# Altium PCB Probe.PcbDoc (part 1 of 2)
Units mil, origin at the board's own origin, x right, y up, seen from the top; angles counter-clockwise.
Board outline 2755.91 x 787.4 mil, 4 copper layers (Top, Ground, Layer 1, Bottom Layer), stack 51.58 mil thick; 53 components, 31 nets, 148 pads, 198 vias.
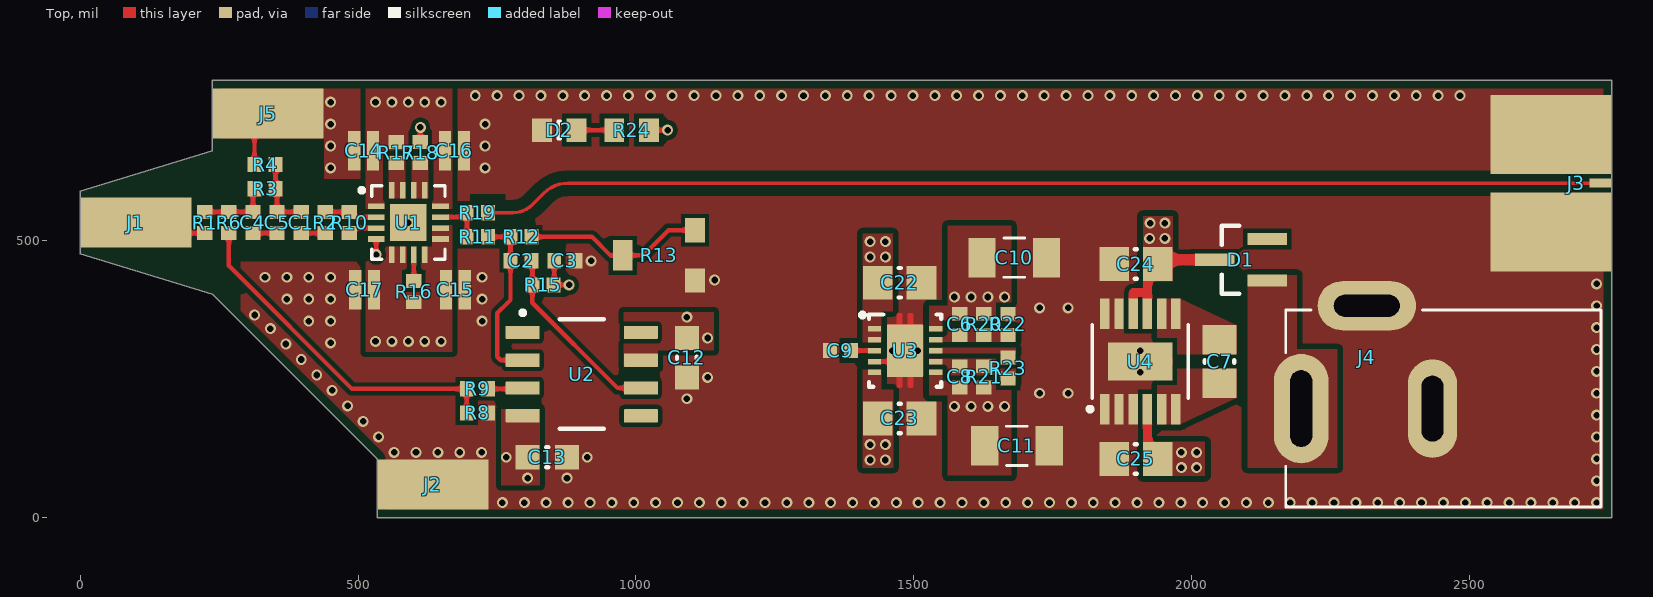
[diagram p0: Top view]
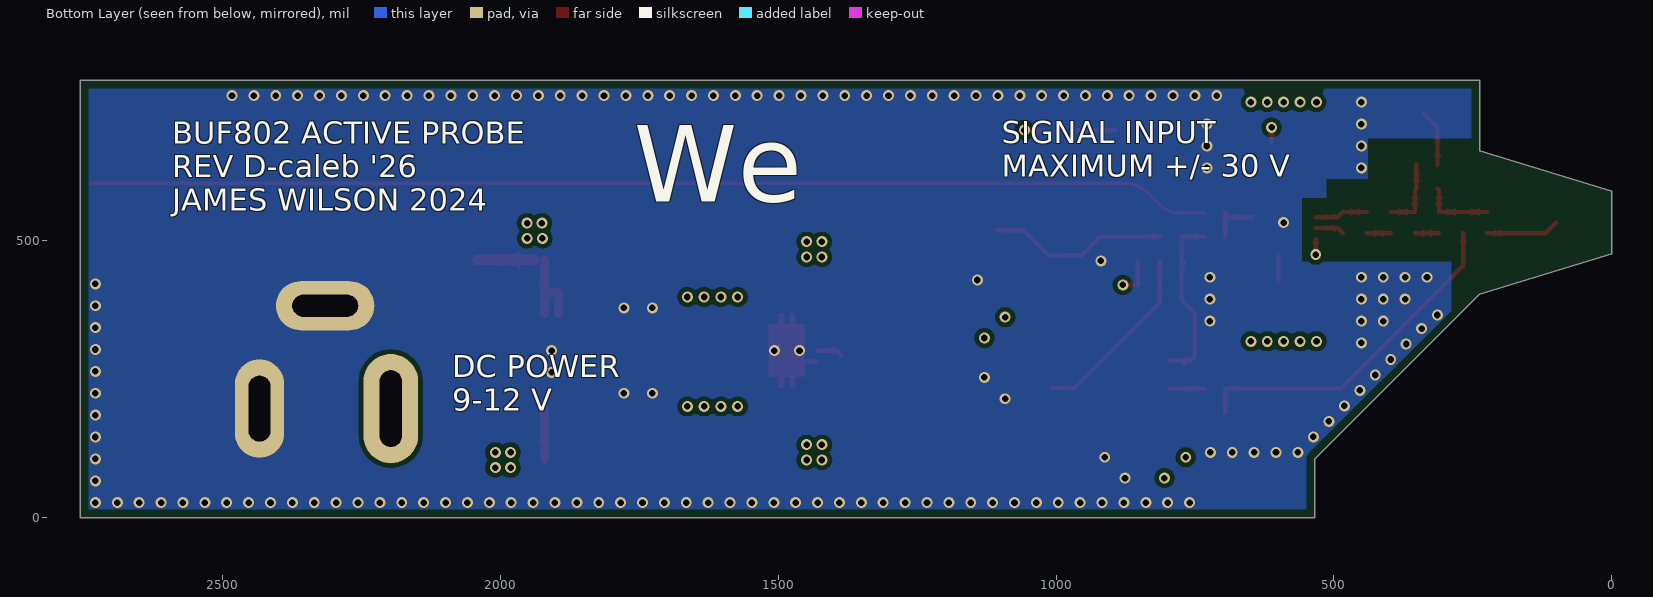
[diagram p1: Bottom Layer view, seen from below]
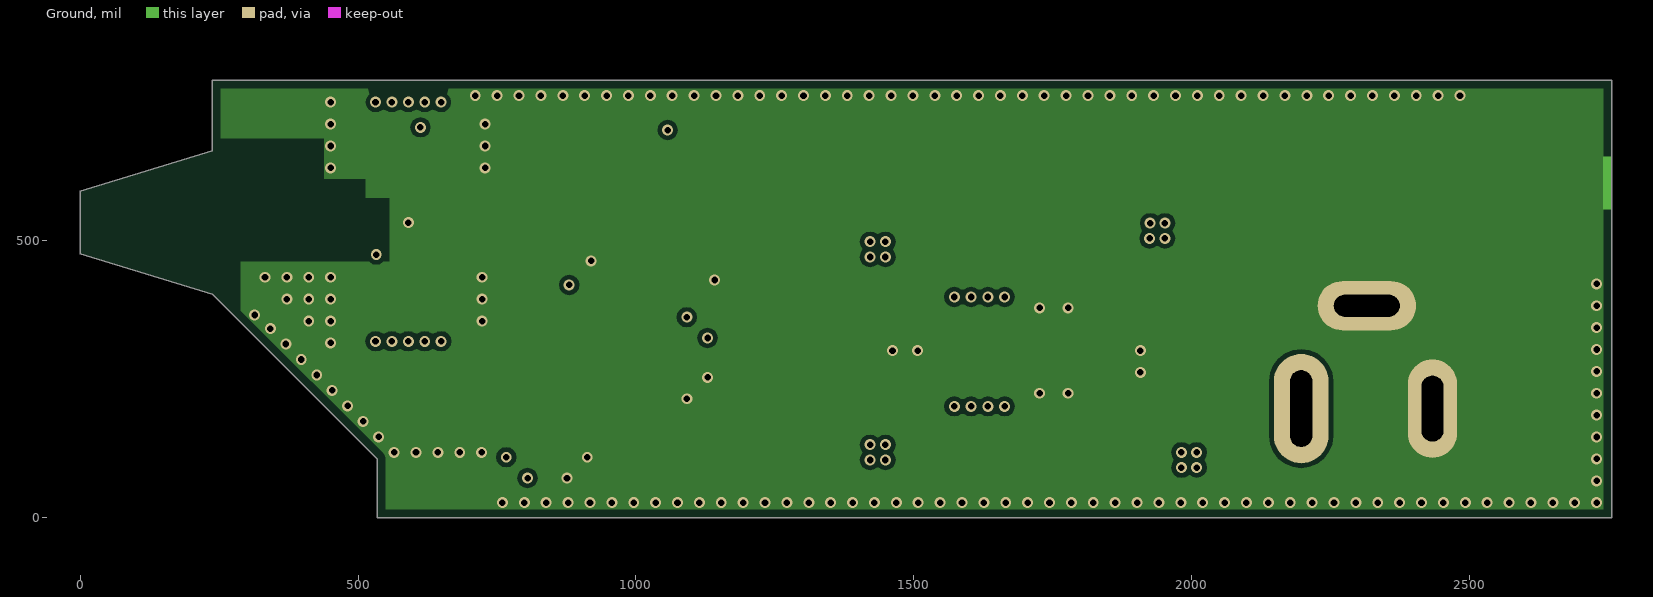
[diagram p2: Ground]
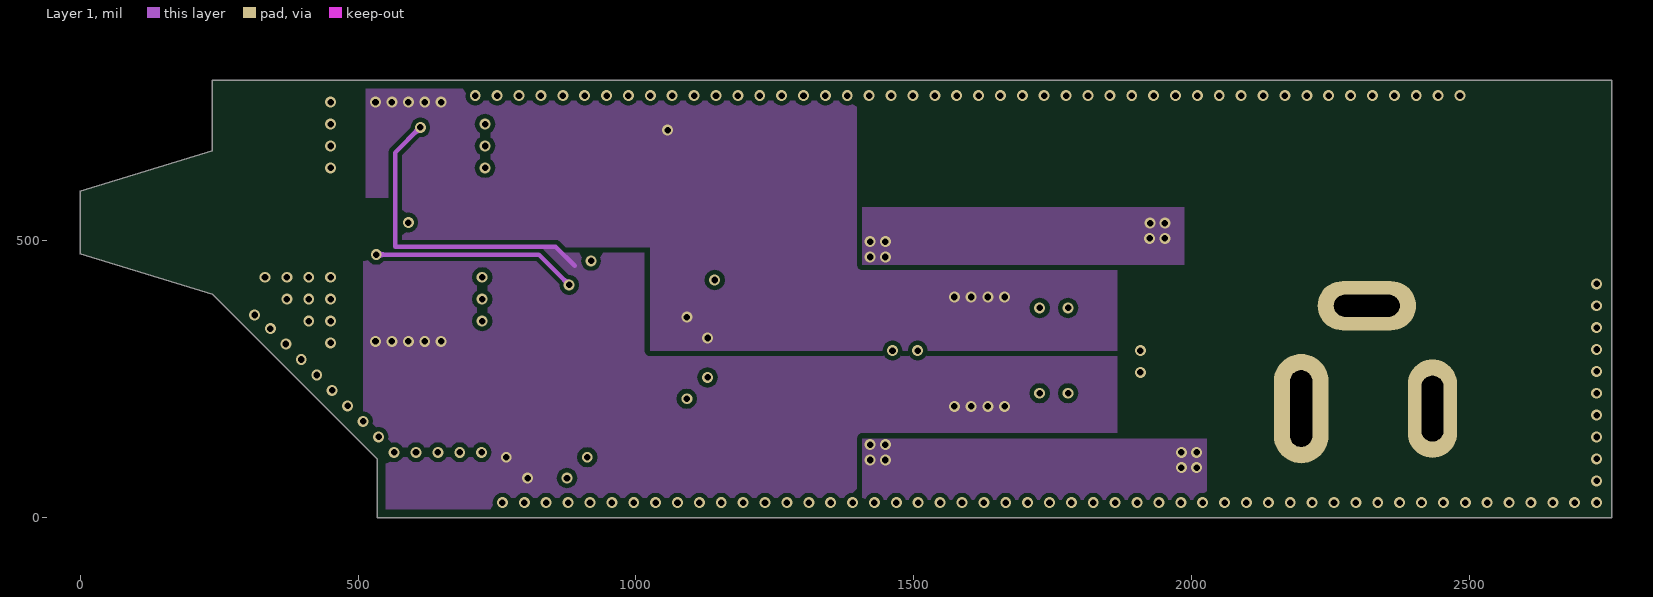
[diagram p3: Layer 1]
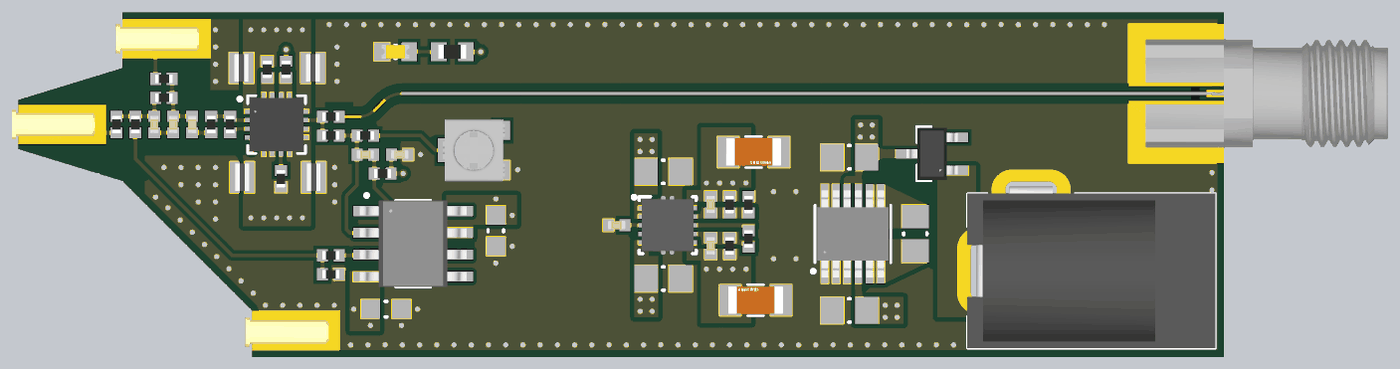
[diagram p4: 3D render of the assembled board from above, using the file's embedded part models]

## Layer stack, top to bottom
Top Solder: solder mask 1, Solder Resist, Dk 3.5
Top: signal copper 1.7
Dielectric 1: prepreg 3.91, PP-015, Dk 4.1
Ground: signal copper 0.68
Dielectric 3: core 39, Dk 3.68
Layer 1: signal copper 0.68
Dielectric 2: prepreg 3.91, PP-015, Dk 4.1
Bottom Layer: signal copper 1.7
Board Layer Stack Bottom Solder: solder mask 1, Solder Resist, Dk 3.5

## Board outline
0,475.45 0,587.54 238.19,660.43 238.19,787.4 2755.91,787.4 2755.91,0 534.45,0 534.45,106.3 238.19,402.56

## Design rules (kind name [scope] priority, off if disabled: settings)
BoardOutlineClearance BoardOutlineClearance_outer [OnCopper and OnOutside] p1: gap=15 ignorepadtopadclearanceinfootprint=FALSE except(0: SMDPad-OutlineEdge)
BoardOutlineClearance BoardOutlineClearance_L3 [OnLayer('Signal/Power')] p2: gap=30 ignorepadtopadclearanceinfootprint=FALSE
BoardOutlineClearance BoardOutlineClearance_inner [OnCopper and not OnOutside] p3: gap=15 ignorepadtopadclearanceinfootprint=FALSE except(0: Fill-OutlineEdge Region-OutlineEdge)
Clearance Clearance_RF_S50 [InNetClass('S50') vs InNet('GND')] p1: gap=20 ignorepadtopadclearanceinfootprint=FALSE except(8: Arc-SMDPad Track-SMDPad SMDPad-SMDPad)
Clearance [All] p2: gap=6 ignorepadtopadclearanceinfootprint=FALSE except(8: Arc-Poly Track-Poly SMDPad-Poly THPad-Poly Via-Poly; 10: Arc-Hole Track-Hole SMDPad-Hole THPad-Hole Via-Hole Fill-Fill Fill-Poly Fill-Region Fill-Hole Poly-Poly Poly-Hole Region-Hole)
HoleSize [All] p1: absolutevalues=TRUE maxlimit=250 minlimit=10 maxpercent=80.000 minpercent=20.000
MinimumSolderMaskSliver [All] p1: minsoldermaskwidth=4
PlaneConnect [All] p1: planeconnectstyle=Direct reliefexpansion=20 reliefentries=4 reliefconductorwidth=10 reliefairgap=10
PolygonConnect PolygonConnect_Relief [InComponentClass('Power plane relief') vs InNet('GND') OR InNet('VEE') OR InNet('VCC')] p1: connectstyle=Relief reliefconductorwidth=10 reliefentries=4 polygonreliefangle="90 Angle" airgapwidth=8
PolygonConnect [All] p2: connectstyle=Direct reliefconductorwidth=10 reliefentries=4 polygonreliefangle="90 Angle" airgapwidth=10
RoutingVias [All] p1: holewidth=11.81 width=19.68 viastyle="Through Hole" minholewidth=11.81 minwidth=17.72 maxholewidth=28 maxwidth=50
SilkToSolderMaskClearance [IsPad] p1: minsilkscreentomaskgap=5 clearancetoexposedcopper=TRUE
SolderMaskExpansion [All] p1: expansion=2 istentingtop=FALSE
SupplyNets "Schematic Supply Nets_4" [InNet('V-')] p1: voltage=0.000
SupplyNets "Schematic Supply Nets_3" [InNet('VCC')] p2: voltage=0.000
SupplyNets "Schematic Supply Nets_2" [InNet('GND')] p3: voltage=0.000
SupplyNets "Schematic Supply Nets_1" [InNet('V+')] p4: voltage=0.000
SupplyNets "Schematic Supply Nets" [InNet('VEE')] p5: voltage=0.000
Width Width_S50 [InNetClass('S50')] p1: maxlimit=10 minlimit=5.7 preferedwidth=10 toplayer_minwidth=6.16 toplayer_maxwidth=6.16 toplayer_prefwidth=6.16 bottomlayer_minwidth=6.16 bottomlayer_maxwidth=6.16 bottomlayer_prefwidth=6.16 impedanceprofiledriven=TRUE impedanceprofileid={79F1E3D4-3417-4B53-9B9C-272FF002CFA8} impedanceprofilevalue=50.000000 minimp=50.000000 maximp=50.000000 favimp=50.000000
Width [All] p2: maxlimit=200 minlimit=4 preferedwidth=10
26 further rules are at their usual default settings.

## Classes and differential pairs
net class S50: OUT
net class Power: GND V+ V- VCC VEE
component class Power: C6 C7 C8 C9 C10 C11 C12 C13 C14 C15 C16 C17 C22 C23 C24 C25 D1 D2 J4 R20 R21 R22 R23 R24 U3 U4
component class Probe: C1 C2 C3 C4 C5 J1 J2 J3 J5 R1 R2 R3 R4 R6 R8 R9 R10 R11 R12 R13 R15 R16 R17 R18 R19 U1 U2

## Components (designator, comment, footprint, x,y, rotation, side; value= is the part's Value field where it differs from the comment)
C1 "330p" CAPC0402(1005)50_M 397.64,531.5 r270 top
C2 "47p" CAPC0402(1005)50_M 793.31,462.6 r0 top
C3 "100p" CAPC0402(1005)50_M 872.05,462.6 r0 top
C4 "1.1p" CAPC0402(1005)50_M 311.02,531.5 r270 top
C5 "1.3p" CAPC0402(1005)50_M 354.33,531.5 r90 top
C6 "10n" CAPC0402(1005)50_M 1582.68,348.43 r90 top
C7 "1u" CAPC0805(2012)145_M 2050.2,281.5 r270 top
C8 "10n" CAPC0402(1005)50_M 1582.68,253.94 r270 top
C9 "10n" CAPC0402(1005)50_M 1367.81,301.18 r180 top
C10 "CL31A226KAHNNNE" CL31H-0_2_MFG 1680.72,468.45 r0 top
C11 "CL31A226KAHNNNE" CL31H-0_2_MFG 1685.39,129.74 r180 top
C12 "100n" CAPC0603(1608)100_M 1091.54,288.39 r270 top
C13 "100n" CAPC0603(1608)100_M 840.55,109.25 r180 top
C14 "100n LICC" CAPC0306_M 510.17,660.81 r180 top
C15 "100n LICC" CAPC0306_M 675.2,410.78 r180 top
C16 "100n LICC" CAPC0306_M 673.55,660.81 r0 top
C17 "100n LICC" CAPC0306_M 511.81,410.78 r0 top
C22 "4.7u" CAPC0805(2012)100_M 1474.41,423.23 r0 top
C23 "4.7u" CAPC0805(2012)100_M 1474.41,179.13 r180 top
C24 "4.7u" CAPC0805(2012)100_M 1899.61,456.69 r180 top
C25 "4.7u" CAPC0805(2012)100_M 1899.61,106.3 r180 top
D1 "BAT54" INF-PG-SC59_M 2088.58,464.57 r180 top
D2 "VLMTG1300-GS08" LED0603(1608)_M 862.2,697.83 r0 top
J1 "0339-0-15-01-15-27-10-0" "MILL-MAX 0339"#1 0,531.5 r0 top
J2 "0339-0-15-01-15-27-10-0" "MILL-MAX 0339"#2 534.45,57.09 r0 top
J3 "901-10511-3" 901-10511-3 2755.91,602.36 r180 top
J4 "2.1/5.5mm" "CUI PJ-002A" 2196.85,196.85 r0 top
J5 "0339-0-15-01-15-27-10-0" "MILL-MAX 0339"#1 238.19,727.4 r0 top
R1 "100" RESC0402(1005)_M 224.41,531.5 r90 top
R2 "0" RESC0402(1005)_M 440.94,531.5 r90 top
R3 "1.60M" RESC0402(1005)_M 332.68,592.52 r0 top
R4 "422K" RESC0402(1005)_M 332.68,635.83 r180 top
R6 "1.91M" RESC0402(1005)_M 267.72,531.5 r270 top
R8 "66.5k" RESC0402(1005)_M 714.57,188.98 r0 top value=66.5K
R9 "68" RESC0402(1005)_M 714.57,232.28 r0 top
R10 "10.0M" RESC0402(1005)_M 484.25,531.5 r270 top
R11 "51.0K" RESC0402(1005)_M 714.57,505.91 r180 top
R12 "10.0K" RESC0402(1005)_M 793.31,505.91 r0 top
R13 "1k" PVG3A 1041.34,472.44 r90 top
R15 "5.60K" RESC0402(1005)_M 832.68,419.29 r180 top
R16 "17.8k" RESC0402(1005)_M 600.39,407.18 r270 top value=17.8K
R17 "1.00K" RESC0402(1005)_M 568.9,657.48 r90 top
R18 "1.00K" RESC0402(1005)_M 612.2,657.48 r90 top
R19 "49.9" RESC0402(1005)_M 714.57,549.21 r0 top
R20 "41.2k" RESC0402(1005)_M 1625.98,348.42 r270 top value=41.2K
R21 "91.0K" RESC0402(1005)_M 1625.98,253.94 r270 top
R22 "10.2k" RESC0402(1005)_M 1669.29,348.43 r90 top value=10.2K
R23 "18.0K" RESC0402(1005)_M 1669.29,269.68 r90 top
R24 "4.70K" RESC0603(1608)_M 992.13,697.83 r180 top
U1 "" "VQFN16_RGT_TEX- OSHPARK" 590.55,531.49 r0 top
U2 "OPA140" SOIC-8 902.56,258.86 r0 top
U3 "TPS7A39" DSC0010J_NV 1484.25,301.18 r0 top
U4 "LTC3261" MSOP-12_MSE 1907.48,281.5 r90 top

## Footprints (in the part's own frame and the unit in brackets; to place one, negate y for a bottom-side part, rotate by r counter-clockwise, add the part's x,y. Pads: shape width x height; smd on the part's side, far side on the other; paste and mask are expansions set on the pad)
901-10511-3 [mil] "901-10511-3"
  rect 40x16 smd paste-1000: 1(20,0)
  rect 218x142 smd paste-1000: 2(109,87.79) 2(109,-87.75)
  body extent -375,-124 179,124, height 127
CAPC0306_M [mm] "CAPC0306(0510)_M"
  rect 0.56x1.81 smd: 1(-0.43,0) 2(0.43,0)
  body extent -0.4,-0.8 0.4,0.8, height 0.55
CAPC0402(1005)50_M [mm] "Chip Capacitor, Body 1.0x0.5mm, Height 0.5mm, IPC Low  Density"
  rect 0.635x0.7 smd: 1(-0.483,0) 2(0.483,0)
  body extent -0.5,-0.25 0.5,0.25, height 0.5
CAPC0603(1608)100_M [mm] "Chip Capacitor, Body 1.6x0.8mm, Height 1.0mm, IPC Low Density"
  rect 1.1x1.1 smd: 1(-0.9,0) 2(0.9,0)
  silkscreen extent -0.05,-0.45 0.05,0.45, body extent -0.87,-0.48 0.88,0.48, height 1
CAPC0805(2012)100_M [mm] "Chip Capacitor, Body 2.0x1.2mm, Height 1.0mm, IPC Low Density"
  rect 1.35x1.55 smd: 1(-1,0) 2(1,0)
  silkscreen extent -0.05,-0.67 0.05,0.67, body extent -1.1,-0.72 1.1,0.72, height 1
CAPC0805(2012)145_M [mm] "Chip Capacitor, Body 2.0x1.2mm, Height 1.45mm, IPC Low Density"
  rect 1.35x1.55 smd: 1(-1,0) 2(1,0)
  silkscreen extent -0.05,-0.67 0.05,0.67, body extent -1.1,-0.72 1.1,0.72, height 1.45
CL31H-0_2_MFG [mm] "Recommended Land Pattern"
  rect 1.25x1.8 smd: 1(-1.475,0) 2(1.475,0)
  silkscreen extent -0.48,-0.9 0.48,0.9, body extent -1.6,-0.8 1.6,0.8, height 1.8
"CUI PJ-002A" [mm] "CUI PJ-002A 2.1/5.5mm barrel jack"
  oval 2.5x5 hole 1 slot 3.5 at 90 deg: 1(0,0)
  oval 2.25x4.5 hole 1 slot 3 at 90 deg: 2(6,0)
  oval 4.5x2.25 hole 1 slot 3 at 0 deg: 3(3,4.7)
  silkscreen extent -0.7,-4.5 13.7,4.5, body extent -0.7,-4.5 13.7,4.9, height 11
DSC0010J_NV [mm]
  rect 0.6x0.25 smd: 1(-1.4,1) 2(-1.4,0.5) 3(-1.4,0) 4(-1.4,-0.5) 5(-1.4,-1) 6(1.4,-1) 7(1.4,-0.5) 8(1.4,0) 9(1.4,0.5) 10(1.4,1)
  rect 1.65x2.4 smd paste-1.187 mask-1.181: 11(0,0)
  Top region: -0.325,-1.7 -0.375,-1.65 -0.375,-1.2 -0.775,-1.2 -0.825,-1.15 -0.825,1.15 -0.775,1.2 -0.375,1.2 -0.375,1.65 -0.325,1.7 -0.325,1.7 -0.175,1.7 -0.175,1.7 -0.125,1.65 -0.125,1.2 0.125,1.2 0.125,1.65 0.175,1.7 0.175,1.7 0.325,1.7 0.325,1.7 0.375,1.65 0.375,1.2 0.775,1.2 0.825,1.15 0.825,-1.15 0.775,-1.2 0.375,-1.2 0.375,-1.65 0.325,-1.7 0.175,-1.7 0.125,-1.65 0.125,-1.2 -0.125,-1.2 -0.125,-1.65 -0.175,-1.7
  silkscreen extent -1.65,-1.65 1.65,1.65, body extent -1.5,-1.5 1.5,1.5, height 0.8
INF-PG-SC59_M [mm] "SOT23, 3-Leads, Body 3x1.53mm, Pitch 0.95mm, IPC Low Density"
  rect 1.8x0.55 smd: 1(-1.2,0.95) 2(-1.2,-0.95) 3(1.2,0)
  silkscreen extent 0.07,-1.55 0.88,1.55, body extent -1.5,-1.51 1.5,1.51, height 1.25
LED0603(1608)_M [mm] "Chip Resistor, Body 1.6x0.8mm, IPC Low Density"
  rect 0.908x1.079 smd: 1(0.79,0) 2(-0.79,0)
  silkscreen extent -0.05,-0.4 0.05,0.4, body extent -0.8,-0.4 0.8,0.4, height 0.8
"MILL-MAX 0339"#1 [mil] "MILL-MAX 0339"
  rect 200x90 smd paste-1000: 1(100,0)
  body extent -15,-34 175,34, height 61
"MILL-MAX 0339"#2 [mil] "MILL-MAX 0339"
  rect 200x90 smd paste-1000: 1(100,2.91)
  body extent -15,-34 175,34, height 61
MSOP-12_MSE [mil]
  rect 55x17 smd: 1(-86,64) 2(-86,38.4) 3(-86,12.8) 4(-86,-12.8) 5(-86,-38.4) 6(-86,-64) 7(86,-64) 8(86,-38.4) 9(86,-12.8) 10(86,12.8) 11(86,38.4) 12(86,64)
  rect 69x116 smd paste-57.5: EPAD(0,0)
  silkscreen extent -66,-86 66,86, body extent -99,-81 99,81, height 43
PVG3A [mm] "SMD Sealed Type Single-Turn PVG3"
  rect 1.1x0.9 smd: 1(1.15,-1.65) 3(-1.15,-1.65)
  rect 1.4x0.9 smd: 2(0,1.65)
  body extent -1.8,-1.8 1.8,1.8, height 1.94
RESC0402(1005)_M [mm] "Chip Resistor, Body 1.0x0.5mm, IPC Low Density"
  rect 0.635x0.7 smd: 1(-0.483,0) 2(0.482,0)
  body extent -0.5,-0.25 0.5,0.25, height 0.35
RESC0603(1608)_M [mm] "Chip Resistor, Body 1.6x0.8mm, IPC Low Density"
  rect 0.908x1.079 smd: 1(-0.79,0) 2(0.79,0)
  body extent -0.8,-0.4 0.8,0.4, height 0.45
SOIC-8 [mm] "SOIC-8"
  rrect8% 1.55x0.6 smd: 1(-2.7,1.905) 2(-2.7,0.635) 3(-2.7,-0.635) 4(-2.7,-1.905) 5(2.7,-1.905) 6(2.7,-0.635) 7(2.7,0.635) 8(2.7,1.905)
  silkscreen extent -1,-2.5 1,2.5, body extent -3.1,-2.5 3.1,2.5, height 1.76
"VQFN16_RGT_TEX- OSHPARK" [mil]
  rect 30x10 smd: 1(-58,29.54) 2(-58,9.85) 3(-58,-9.85) 4(-58,-29.53) 9(58,-29.53) 10(58,-9.85) 11(58,9.85) 12(58,29.54)
  rect 10x30 smd: 5(-29.53,-58) 6(-9.85,-58) 7(9.85,-58) 8(29.54,-58) 13(29.54,58) 14(9.85,58) 15(-9.85,58) 16(-29.53,58)
  rect 66.14x66.14 smd: 17(0,0)
  silkscreen extent -66,-66 66,66, body extent -61,-61 61,61, height 39

## Part data
C1: library part GRM1555C1H331JA01, "CAP CER 330PF±5% 50V C0G 0402", Capacitance=330pF, Manufacturer=Murata, Manufacturer Part Number=GRM1555C1H331JA01D, Temperature Coefficient=C0G, Tolerance=±5%, Part Number=GRM1555C1H331JA01
C2: library part CL05C470JB5NNN, "CAP CER 47PF±5% 50V C0G 0402", Capacitance=47pF, Manufacturer="Samsung Electro-Mechanics", Manufacturer Part Number=CL05C470JB5NNNC, Temperature Coefficient=C0G, Tolerance=±5%, Voltage Rating=50V, Part Number=CL05C470JB5NNN
C3: library part CL05C101JB5NNN, "CAP CER 100PF±5% 50V C0G 0402", Capacitance=100pF, Manufacturer="Samsung Electro-Mechanics", Manufacturer Part Number=CL05C101JB5NNNC, Temperature Coefficient=C0G, Tolerance=±5%, Voltage Rating=50V, Part Number=CL05C101JB5NNN
C4: library part GJM1555C1H1R1WB01, "CAP CER 1.1PF±0.05PF 50V C0G/NP0 0402", Capacitance=1.1pF, Manufacturer=Murata, Manufacturer Part Number=GJM1555C1H1R1WB01D, Temperature Coefficient=C0G, Tolerance=±0.05pF, Part Number=GJM1555C1H1R1WB01
C5: library part GJM1555C1H1R3WB01, "CAP CER 1.3PF±0.05PF 50V C0G/NP0 0402", Capacitance=1.3pF, Manufacturer=Murata, Manufacturer Part Number=GJM1555C1H1R3WB01D, Temperature Coefficient=C0G, Tolerance=±0.05pF, Part Number=GJM1555C1H1R3WB01
C6 C8 C9: library part GRM1555C1E103JE01, "CAP CER 10NF±5% 25V C0G 0402", Capacitance=10nF, Manufacturer=Murata, Manufacturer Part Number=GRM1555C1E103JE01D, Temperature Coefficient=C0G, Tolerance=±5%, Part Number=GRM1555C1E103JE01
C7: library part CC0805KKX7R9BB105, "Cap Ceramic 1uF 50V X7R 10% SMD 0805 125C Blister T/R", Capacitance=1uF, Case Code (Imperial)=0805, Case Code (Metric)=2012, Dielectric=X7R, Manufacturer=Yageo, Max Operating Temperature=125°C, Min Operating Temperature=-55°C, Supplier Part Number 1=311-1886-1-ND, Tolerance=10%, Voltage Rating=50V, Case/Package=0805, ComponentLink1Description=http://www.mouser.com/ds/2/447/Yageo_UPY-GP_NP0_16V-to-50V_9-358835.pdf?src-supplier=Mouser, ComponentLink1URL=http://www.mouser.com/ds/2/447/Yageo_UPY-GP_NP0_16V-to-50V_9-358835.pdf?src-supplier=Mouser, Composition=Ceramic, Depth=1.25mm, Halogen Free="Halogen Free", Height=1.25mm, Lead Free="Lead Free", Length=2mm, Manufacturer Part Number=CC0805KKX7R9BB105, Mount="Surface Mount", Packaging="Tape and Reel", Pricing 1="1=0.27, 10=0.188, 100=0.1064, 500=0.0751, 1000=0.06571 (USD)", Radiation Hardening=No, Stock 1=558291, Supplier 1=Digi-Key, Supplier 2=Mouser, Supplier Part Number 2=603-CC805KKX7R9BB105, Termination=SMD/SMT, Thickness=0.057inch, Voltage Rating (DC)=50V, Weight=0.000194oz, Width=0.049inch
C10 C11: library part CMP-13271-000012-2, "Ceramic Capacitor, Multilayer, Ceramic, 25V, 10% +Tol, 10% -Tol, X5R, 15% TC, 22uF, Surface Mount, 1206", Capacitance=22µF, Case/Package=1206, Dielectric=X5R, Max Operating Temperature=85°C, Min Operating Temperature=-55°C, Tolerance=10%, Voltage Rating=25V, ComponentLink2Description="Datasheet URL", ComponentLink2URL=https://product.samsungsem.com/mlcc/CL31A226KAHNNN.do, Height=1.8mm, HelpURL=https://product.samsungsem.com/mlcc/CL31A226KAHNNN.do, Material=Ceramic, RoHS=Compliant, Voltage Rating (DC)=25V
C12 C13: library part CC0603KRX7R9BB104, "CAPACITOR CERAMIC, 0.1UF, 50V, X7R, 10%, 0603", Capacitance=100nF, Case Code (Imperial)=0603, Case Code (Metric)=1608, Dielectric=X7R, Dielectric Material=Ceramic, LCSC PART #=C14663, Manufacturer=Yageo, Max Operating Temperature=125°C, Min Operating Temperature=-55°C, Package Quantity=1, Supplier Part Number 1=311-1344-1-ND, Tolerance=10%, Voltage=50V, Case/Package=0603, ComponentLink1Description=http://www.yageo.com/documents/recent/UPY-GPHC_X7R_6.3V-to-50V_18.pdf?src-supplier=Digi-Key, ComponentLink1URL=http://www.yageo.com/documents/recent/UPY-GPHC_X7R_6.3V-to-50V_18.pdf?src-supplier=Digi-Key, ComponentLink2Description=http://www.farnell.com/datasheets/1489800.pdf?src-supplier=Element14, ComponentLink2URL=http://www.farnell.com/datasheets/1489800.pdf?src-supplier=Element14, ComponentLink3Description=http://www.yageo.com/documents/recent/UPY-GPHC_X7R_6.3V-to-50V_8.pdf?src-supplier=Avnet+Europe, ComponentLink3URL=http://www.yageo.com/documents/recent/UPY-GPHC_X7R_6.3V-to-50V_8.pdf?src-supplier=Avnet+Europe, ComponentLink4Description=http://www.farnell.com/datasheets/2167236.pdf?src-supplier=Element14, ComponentLink4URL=http://www.farnell.com/datasheets/2167236.pdf?src-supplier=Element14, ComponentLink5Description=http://www.farnell.com/datasheets/1489800.pdf?src-supplier=Farnell, ComponentLink5URL=http://www.farnell.com/datasheets/1489800.pdf?src-supplier=Farnell, Depth=0.8mm, Halogen Free="Halogen Free", Height=0.8mm, Lead Free="Lead Free", Length=1.6mm, Manufacturer Part Number=CC0603KRX7R9BB104, Mount="Surface Mount", Number of Pins=2, Packaging="Tape and Reel", Pricing 1="1=0.1, 10=0.066, 50=0.036, 100=0.0293, 500=0.02094, 1000=0.01646 (USD)", Radiation Hardening=No, REACH SVHC="No SVHC", Stock 1=0, Supplier 1=Digi-Key, Supplier 2=Mouser, Supplier Part Number 2=603-CC603KRX7R9BB104, Termination=SMD/SMT, Thickness=0.035inch, Voltage Rating=50V, Width=0.031inch
C14 C15 C16 C17: library part TWK107B7104MVHT, "CAP CER 0.1UF 25V X7R 0306", Capacitance=100nF, Case Code (Imperial)=0306, Case Code (Metric)=0816, LCSC PN=C2217498, Manufacturer="Taiyo Yuden", Max Operating Temperature=125°C, Min Operating Temperature=-55°C, Ratings=AEC-Q200, Supplier Part Number 1=587-6181-1-ND, Tolerance=20%, Voltage Rating=25V, Case/Package=0306, ComponentLink1Description=http://ds.yuden.co.jp/TYCOMPAS/ut/detail.do?productNo=TWK107B7104MVHT&amp;fileName=TWK107B7104MVHT_SS&amp;mode=specSheetDownload&src-supplier=Digi-Key, ComponentLink1URL=http://ds.yuden.co.jp/TYCOMPAS/ut/detail.do?productNo=TWK107B7104MVHT&amp;fileName=TWK107B7104MVHT_SS&amp;mode=specSheetDownload&src-supplier=Digi-Key, ComponentLink2Description="https://ds.yuden.co.jp/TYCOMPAS/ut/detail?pn=TWK107B7104MVHT &amp;u=M&src-supplier=Digi-Key", ComponentLink2URL="https://ds.yuden.co.jp/TYCOMPAS/ut/detail?pn=TWK107B7104MVHT &amp;u=M&src-supplier=Digi-Key", Manufacturer Part Number=TWK107B7104MVHT, Mount="Surface Mount", Packaging="Tape and Reel", Pricing 1="1=0.31, 10=0.219, 50=0.153, 100=0.1312, 500=0.0984, 1000=0.08309 (USD)", RoHS Compliant=Yes, Stock 1=9611, Supplier 1=Digi-Key, Supplier 2=Mouser, Supplier Part Number 2=963-TWK107B7104MVHT
C22 C23 C24 C25: library part GRM21BZ71H475KE15K, "CAP CER 4.7UF 50V X7R 0805", Manufacturer=Murata, Supplier Part Number 1=490-GRM21BZ71H475KE15KCT-ND, ComponentLink1Description=https://datasheet.octopart.com/GRM21BZ71H475KE15K-Murata-datasheet-149523520.pdf?src-supplier=Newark, ComponentLink1URL=https://datasheet.octopart.com/GRM21BZ71H475KE15K-Murata-datasheet-149523520.pdf?src-supplier=Newark, ComponentLink2Description=https://datasheet.octopart.com/GRM21BZ71H475KE15K-Murata-datasheet-165579666.pdf?src-supplier=TME, ComponentLink2URL=https://datasheet.octopart.com/GRM21BZ71H475KE15K-Murata-datasheet-165579666.pdf?src-supplier=TME, Manufacturer Part Number=GRM21BZ71H475KE15K, Pricing 1="1=0.6, 10=0.444, 50=0.3554, 100=0.3047, 500=0.2412, 1000=0.20311, 2500=0.19042, 5000=0.17772 (USD)", RoHS Compliant=Yes, Stock 1=134344, Supplier 1=Digi-Key, Supplier 2=Mouser, Supplier Part Number 2=81-GRM21BZ71H475KE5K
D1: "DIODE SCHOTTKY 30V 200MA TO236AB", Manufacturer="Nexperia USA", Manufacturer Part Number=BAT54,215, Supplier Part Number 1=1727-2900-6-ND, Stock 1=0, Supplier 1=Digi-Key
D2: "LED GREEN 0603 SMD", Case Code (Imperial)=0603, Case Code (Metric)=1608, Color=Green, Forward Current=20mA, Forward Voltage=3.2V, Manufacturer="Vishay Semiconductors", Max Operating Temperature=85°C, Max Power Dissipation=76mW, Min Operating Temperature=-35°C, Package Quantity=1, Power Rating=75mW, Supplier Part Number 1=VLMTG1300-GS08CT-ND, Case/Package=0603, ComponentLink1Description=https://datasheet.ciiva.com/26322/vlmo1300-26322149.pdf?src-supplier=Element14, ComponentLink1URL=https://datasheet.ciiva.com/26322/vlmo1300-26322149.pdf?src-supplier=Element14, ComponentLink2Description=https://datasheet.ciiva.com/8028/vlmo1300-8028077.pdf?src-supplier=Element14, ComponentLink2URL=https://datasheet.ciiva.com/8028/vlmo1300-8028077.pdf?src-supplier=Element14, ComponentLink3Description=https://datasheet.ciiva.com/16510/vlmo1300-16510989.pdf?src-supplier=Future+Electronics, ComponentLink3URL=https://datasheet.ciiva.com/16510/vlmo1300-16510989.pdf?src-supplier=Future+Electronics, ComponentLink4Description=https://datasheet.ciiva.com/2115/vlmo1300-2115107.pdf?src-supplier=Digi-Key, ComponentLink4URL=https://datasheet.ciiva.com/2115/vlmo1300-2115107.pdf?src-supplier=Digi-Key, ComponentLink5Description=https://datasheet.ciiva.com/2115/vlmo1300-2115108.pdf?src-supplier=Digi-Key, ComponentLink5URL=https://datasheet.ciiva.com/2115/vlmo1300-2115108.pdf?src-supplier=Digi-Key, ComponentLink6Description=https://datasheet.ciiva.com/2115/vlmo1300-2115106.pdf?src-supplier=Digi-Key, ComponentLink6URL=https://datasheet.ciiva.com/2115/vlmo1300-2115106.pdf?src-supplier=Digi-Key, Contact Plating=Tin,Matte, Depth=0.8mm, Dominant Wavelength=525nm, Height=0.8mm, Illumination Color=Green, Lead Free="Lead Free", Length=1.6mm, Lens Style=Rectangular,Clear, Luminous Intensity=450mcd, Manufacturer Part Number=VLMTG1300-GS08, Mount="Surface Mount", Number of Elements=1, Number of LEDs=1, Number of Pins=2, Packaging="Tape and Reel", Power Dissipation=76mW, Pricing 1="1=0.46, 10=0.305, 100=0.2033, 500=0.1406, 1000=0.11716 (USD)", Radiation Hardening=No, RoHS Compliant=Yes, Series=CHipLED, Stock 1=156996, Supplier 1=Digi-Key, Supplier 2=Mouser, Supplier Part Number 2=78-VLMTG1300-GS08, Test Current=20mA, Viewing Angle=130°, Wavelength=525nm, Width=0.8mm
J1 J2 J5: "CONN PIN RCPT", Manufacturer=Mill-Max, Max Operating Temperature=125°C, Min Operating Temperature=-55°C, Supplier Part Number 1=0339-0-15-01-15-27-10-0-ND, ComponentLink1Description=https://www.mill-max.com/assets/pdfs/172.pdf?src-supplier=Digi-Key, ComponentLink1URL=https://www.mill-max.com/assets/pdfs/172.pdf?src-supplier=Digi-Key, ComponentLink2Description=https://datasheet.octopart.com/0339-0-15-01-15-27-10-0-Mill-Max-datasheet-26446830.pdf?src-supplier=Future+Electronics, ComponentLink2URL=https://datasheet.octopart.com/0339-0-15-01-15-27-10-0-Mill-Max-datasheet-26446830.pdf?src-supplier=Future+Electronics, ComponentLink3Description=http://www.mouser.com/ds/2/273/172M-276194.pdf?src-supplier=Mouser, ComponentLink3URL=http://www.mouser.com/ds/2/273/172M-276194.pdf?src-supplier=Mouser, ComponentLink4Description=https://datasheet.octopart.com/0339-0-15-01-15-27-10-0-Mill-Max-datasheet-155663258.pdf?src-supplier=Sager+Electronics, ComponentLink4URL=https://datasheet.octopart.com/0339-0-15-01-15-27-10-0-Mill-Max-datasheet-155663258.pdf?src-supplier=Sager+Electronics, Contact Material=Copper, Contact Plating=Gold, Manufacturer Part Number=0339-0-15-01-15-27-10-0, Packaging=Bulk, Pricing 1="1=1.42, 10=1.234, 25=1.1812, 50=1.155, 100=1.1025, 250=0.99748, 500=0.91874, 1000=0.7875, 2500=0.735 (USD)", RoHS Compliant=No, Series=0339, Stock 1=989, Supplier 1=Digi-Key, Supplier 2=Mouser, Supplier Part Number 2=575-0339015011527100, Termination=Solder
J3: "CONN SMA JACK STR 50OHM EDGE MNT", Case/Package=SMA, Manufacturer="Amphenol RF", Max Frequency=26.5GHz, Max Operating Temperature=165°C, Min Operating Temperature=-65°C, Supplier Part Number 1=ARF2500-ND, Voltage Rating=170V, ComponentLink1Description=https://datasheet.octopart.com/901-10511-3-Amphenol-RF-datasheet-67291285.pdf?src-supplier=Element14, ComponentLink1URL=https://datasheet.octopart.com/901-10511-3-Amphenol-RF-datasheet-67291285.pdf?src-supplier=Element14, ComponentLink2Description=https://datasheet.octopart.com/901-10511-3-Amphenol-RF-datasheet-67291280.pdf?src-supplier=Newark, ComponentLink2URL=https://datasheet.octopart.com/901-10511-3-Amphenol-RF-datasheet-67291280.pdf?src-supplier=Newark, ComponentLink3Description=http://www.amphenolrf.com/media/downloads/7776/C901-10511-3.pdf?src-supplier=Digi-Key, ComponentLink3URL=http://www.amphenolrf.com/media/downloads/7776/C901-10511-3.pdf?src-supplier=Digi-Key, Connector Type=SMA, Contact Material=Copper, Fastening Type=Threaded, Impedance=50R, Manufacturer Part Number=901-10511-3, Mount=Edge,Board, Packaging=Bulk, Pricing 1="1=9.78, 10=8.804, 25=8.2936, 50=8.081, 100=7.8684, 250=7.01772, 500=6.59242, 1000=5.82685 (USD)", RoHS Compliant=Yes, Series=-, Stock 1=1568, Supplier 1=Digi-Key, Supplier 2=Mouser, Supplier Part Number 2=523-901-10511-3, Termination=Solder
J4: library part PJ-002A, "CONN PWR JACK 2X5.5MM SOLDER", Color=Black, Current Rating=2.5A, Flammability Rating="UL94 V-0", Insulation Resistance=50MR, Manufacturer=CUI, Max Operating Temperature=85°C, Min Operating Temperature=-25°C, Package Quantity=500, Supplier Part Number 1=CP-002A-ND, Voltage Rating=24V, Connector Type=Jack, Contact Gender=Male, Contact Material="Copper Alloy,Copper", Contact Plating=Tin,Nickel, Diameter=2.1mm, Gender=Male, Housing Color=Black, Housing Material=Thermoplastic, Lead Free="Lead Free", Manufacturer Part Number=PJ-002A, Mount="Through Hole", Number of Conductors=2, Orientation=Horizontal, Packaging=Bulk, Pricing 1="1=0.6, 10=0.558, 25=0.5024, 50=0.4464, 100=0.4278, 250=0.3906, 500=0.372, 1000=0.3069, 2500=0.279 (USD)", Shielding=Unshielded, Stock 1=60290, Supplier 1=Digi-Key, Supplier 2=Mouser, Supplier Part Number 2=490-PJ-002A, Termination="Through Hole"
R1: library part RESC0402-100R-1pct, "RES 100 OHM 1% 1/16W 0402", Manufacturer 1=Yageo, Manufacturer 2="Stackpole Electronics", Manufacturer 3="Vishay Dale", Manufacturer 4="Panasonic Electronic Components", Manufacturer Part Number 1=RC0402FR-07100RL, Manufacturer Part Number 2=RMCF0402FT100R, Manufacturer Part Number 3=CRCW0402100RFKED, Manufacturer Part Number 4=ERJ-2RKF1000X, Ohms=100, Part Number=RESC0402-100R-1pct
R2: library part R0402-0R0-JMP, "RES 0 OHM JUMPER 0402", Manufacturer 1=Yageo, Manufacturer 2="Stackpole Electronics", Manufacturer 3="Vishay Dale", Manufacturer 4="Panasonic Electronic Components", Manufacturer Part Number 1=RC0402FR-071RL, Manufacturer Part Number 2=RMCF0402FT1R00, Manufacturer Part Number 3=CRCW04021R00FNED, Manufacturer Part Number 4=ERJ-2GE0R00X, Ohms=0, Part Number=R0402-0R0-JMP
R3: library part RESC0402-1M60-1pct, "RES 1.60M OHM 1% 1/16W 0402", Manufacturer 1=Yageo, Manufacturer 2="Stackpole Electronics", Manufacturer 3="Vishay Dale", Manufacturer 4="Panasonic Electronic Components", Manufacturer Part Number 1=RC0402FR-071M6L, Manufacturer Part Number 2=RMCF0402FT1M60, Manufacturer Part Number 3=CRCW04021M60FKED, Ohms=1600000, Part Number=RESC0402-1M60-1pct
R4: library part RESC0402-422K-1pct, "RES 422K OHM 1% 1/16W 0402", Manufacturer 1=Yageo, Manufacturer 2="Stackpole Electronics", Manufacturer 3="Vishay Dale", Manufacturer 4="Panasonic Electronic Components", Manufacturer Part Number 1=RC0402FR-07422KL, Manufacturer Part Number 2=RMCF0402FT422K, Manufacturer Part Number 3=CRCW0402422KFKED, Manufacturer Part Number 4=ERJ-2RKF4223X, Ohms=422000, Part Number=RESC0402-422K-1pct
R6: library part RESC0402-1M91-1pct, "RES 1.91M OHM 1% 1/16W 0402", Manufacturer 1=Yageo, Manufacturer 2="Stackpole Electronics", Manufacturer 3="Vishay Dale", Manufacturer 4="Panasonic Electronic Components", Manufacturer Part Number 1=RC0402FR-071M91L, Manufacturer Part Number 2=RMCF0402FT1M91, Manufacturer Part Number 3=CRCW04021M91FKED, Ohms=1910000, Part Number=RESC0402-1M91-1pct
R8: library part RESC0402-66K5-1pct, "RES 66.5K OHM 1% 1/16W 0402", Manufacturer 1=Yageo, Manufacturer 2="Stackpole Electronics", Manufacturer 3="Vishay Dale", Manufacturer 4="Panasonic Electronic Components", Manufacturer Part Number 1=RC0402FR-0766K5L, Manufacturer Part Number 2=RMCF0402FT66K5, Manufacturer Part Number 3=CRCW040266K5FKED, Manufacturer Part Number 4=ERJ-2RKF6652X, Ohms=66500, Part Number=RESC0402-66K5-1pct
R9: library part RESC0402-68R0-1pct, "RES 68 OHM 1% 1/16W 0402", Manufacturer 1=Yageo, Manufacturer 2="Stackpole Electronics", Manufacturer 3="Vishay Dale", Manufacturer 4="Panasonic Electronic Components", Manufacturer Part Number 1=RC0402FR-0768RL, Manufacturer Part Number 2=RMCF0402FT68R0, Manufacturer Part Number 3=CRCW040268R0FKED, Manufacturer Part Number 4=ERJ-2RKF68R0X, Ohms=68, Part Number=RESC0402-68R0-1pct
R10: library part RESC0402-10M0-1pct, "RES 10.0M OHM 1% 1/16W 0402", Manufacturer 1=Yageo, Manufacturer 2="Stackpole Electronics", Manufacturer 3="Vishay Dale", Manufacturer 4="Panasonic Electronic Components", Manufacturer Part Number 1=RC0402FR-0710ML, Manufacturer Part Number 2=RMCF0402FT10M0, Manufacturer Part Number 3=CRCW040210M0FKED, Ohms=10000000, Part Number=RESC0402-10M0-1pct
R11: library part RESC0402-51K0-1pct, "RES 51.0K OHM 1% 1/16W 0402", Manufacturer 1=Yageo, Manufacturer 2="Stackpole Electronics", Manufacturer 3="Vishay Dale", Manufacturer 4="Panasonic Electronic Components", Manufacturer Part Number 1=RC0402FR-0751KL, Manufacturer Part Number 2=RMCF0402FT51K0, Manufacturer Part Number 3=CRCW040251K0FKED, Manufacturer Part Number 4=ERJ-2RKF5102X, Ohms=51000, Part Number=RESC0402-51K0-1pct
R12: library part RESC0402-10K0-1pct, "RES 10.0K OHM 1% 1/16W 0402", Manufacturer 1=Yageo, Manufacturer 2="Stackpole Electronics", Manufacturer 3="Vishay Dale", Manufacturer 4="Panasonic Electronic Components", Manufacturer Part Number 1=RC0402FR-0710KL, Manufacturer Part Number 2=RMCF0402FT10K0, Manufacturer Part Number 3=CRCW040210K0FKED, Manufacturer Part Number 4=ERJ-2RKF1002X, Ohms=10000, Part Number=RESC0402-10K0-1pct
R13: library part PVG3A102C01R00, "TRIMMER 1K OHM 0.25W J LEAD TOP", Manufacturer=Bourns, Max Power Dissipation=250mW, Resistance=1kR, Resistor Type=Cermet, Supplier Part Number 1=490-2643-6-ND, Temperature Coefficient=150ppm/°C, Tolerance=20%, ComponentLink1Description=https://datasheet.octopart.com/PVG3A102C01R00-Bourns-datasheet-154729832.pdf?src-supplier=Newark, ComponentLink1URL=https://datasheet.octopart.com/PVG3A102C01R00-Bourns-datasheet-154729832.pdf?src-supplier=Newark, ComponentLink2Description=https://datasheet.octopart.com/PVG3A102C01R00-Bourns-datasheet-82548162.pdf?src-supplier=Element14, ComponentLink2URL=https://datasheet.octopart.com/PVG3A102C01R00-Bourns-datasheet-82548162.pdf?src-supplier=Element14, ComponentLink3Description=https://www.bourns.com/docs/Product-Datasheets/pvg3.pdf?src-supplier=Digi-Key, ComponentLink3URL=https://www.bourns.com/docs/Product-Datasheets/pvg3.pdf?src-supplier=Digi-Key, ComponentLink4Description=http://www.bourns.com/docs/Product-Datasheets/pvg3.pdf?src-supplier=Digi-Key, ComponentLink4URL=http://www.bourns.com/docs/Product-Datasheets/pvg3.pdf?src-supplier=Digi-Key, ComponentLink5Description=https://www.mouser.com/ds/2/54/vg3-1084610.pdf?src-supplier=Mouser, ComponentLink5URL=https://www.mouser.com/ds/2/54/vg3-1084610.pdf?src-supplier=Mouser, Height=0.079inch, Manufacturer Part Number=PVG3A102C01R00, Mount="Surface Mount", Number of Turns=1, Packaging="Cut Tape", Pricing 1="1=1.44, 10=1.273, 25=1.1452, 50=1.103, 100=1.0605, 250=0.99688, 500=0.8484 (USD)", Stock 1=4867, Supplier 1=Digi-Key, Supplier 2=Mouser, Supplier Part Number 2=81-PVG3A102C01R00
R15: library part RESC0402-5K60-1pct, "RES 5.60K OHM 1% 1/16W 0402", Manufacturer 1=Yageo, Manufacturer 2="Stackpole Electronics", Manufacturer 3="Vishay Dale", Manufacturer 4="Panasonic Electronic Components", Manufacturer Part Number 1=RC0402FR-075K6L, Manufacturer Part Number 2=RMCF0402FT5K60, Manufacturer Part Number 3=CRCW04025K60FKED, Manufacturer Part Number 4=ERJ-2RKF5601X, Ohms=5600, Part Number=RESC0402-5K60-1pct
R16: library part RESC0402-17K8-1pct, "RES 17.8K OHM 1% 1/16W 0402", Manufacturer 1=Yageo, Manufacturer 2="Stackpole Electronics", Manufacturer 3="Vishay Dale", Manufacturer 4="Panasonic Electronic Components", Manufacturer Part Number 1=RC0402FR-0717K8L, Manufacturer Part Number 2=RMCF0402FT17K8, Manufacturer Part Number 3=CRCW040217K8FKED, Manufacturer Part Number 4=ERJ-2RKF1782X, Ohms=17800, Part Number=RESC0402-17K8-1pct
R17 R18: library part RESC0402-1K00-1pct, "RES 1.00K OHM 1% 1/16W 0402", Manufacturer 1=Yageo, Manufacturer 2="Stackpole Electronics", Manufacturer 3="Vishay Dale", Manufacturer 4="Panasonic Electronic Components", Manufacturer Part Number 1=RC0402FR-071KL, Manufacturer Part Number 2=RMCF0402FT1K00, Manufacturer Part Number 3=CRCW04021K00FKED, Manufacturer Part Number 4=ERJ-2RKF1001X, Ohms=1000, Part Number=RESC0402-1K00-1pct
R19: library part RESC0402-49R9-1pct, "RES 49.9 OHM 1% 1/16W 0402", Manufacturer 1=Yageo, Manufacturer 2="Stackpole Electronics", Manufacturer 3="Vishay Dale", Manufacturer 4="Panasonic Electronic Components", Manufacturer Part Number 1=RC0402FR-0749R9L, Manufacturer Part Number 2=RMCF0402FT49R9, Manufacturer Part Number 3=CRCW040249R9FKED, Manufacturer Part Number 4=ERJ-2RKF49R9X, Ohms=49.9, Part Number=RESC0402-49R9-1pct
R20: library part RESC0402-41K2-1pct, "RES 41.2K OHM 1% 1/16W 0402", Manufacturer 1=Yageo, Manufacturer 2="Stackpole Electronics", Manufacturer 3="Vishay Dale", Manufacturer 4="Panasonic Electronic Components", Manufacturer Part Number 1=RC0402FR-0741K2L, Manufacturer Part Number 2=RMCF0402FT41K2, Manufacturer Part Number 3=CRCW040241K2FKED, Manufacturer Part Number 4=ERJ-2RKF4122X, Ohms=41200, Part Number=RESC0402-41K2-1pct
R21: library part RESC0402-91K0-1pct, "RES 91.0K OHM 1% 1/16W 0402", Manufacturer 1=Yageo, Manufacturer 2="Stackpole Electronics", Manufacturer 3="Vishay Dale", Manufacturer 4="Panasonic Electronic Components", Manufacturer Part Number 1=RC0402FR-0791KL, Manufacturer Part Number 2=RMCF0402FT91K0, Manufacturer Part Number 3=CRCW040291K0FKED, Manufacturer Part Number 4=ERJ-2RKF9102X, Ohms=91000, Part Number=RESC0402-91K0-1pct
R22: library part RESC0402-10K2-1pct, "RES 10.2K OHM 1% 1/16W 0402", Manufacturer 1=Yageo, Manufacturer 2="Stackpole Electronics", Manufacturer 3="Vishay Dale", Manufacturer 4="Panasonic Electronic Components", Manufacturer Part Number 1=RC0402FR-0710K2L, Manufacturer Part Number 2=RMCF0402FT10K2, Manufacturer Part Number 3=CRCW040210K2FKED, Manufacturer Part Number 4=ERJ-2RKF1022X, Ohms=10200, Part Number=RESC0402-10K2-1pct
R23: library part RESC0402-18K0-1pct, "RES 18.0K OHM 1% 1/16W 0402", Manufacturer 1=Yageo, Manufacturer 2="Stackpole Electronics", Manufacturer 3="Vishay Dale", Manufacturer 4="Panasonic Electronic Components", Manufacturer Part Number 1=RC0402FR-0718KL, Manufacturer Part Number 2=RMCF0402FT18K0, Manufacturer Part Number 3=CRCW040218K0FKED, Manufacturer Part Number 4=ERJ-2RKF1802X, Ohms=18000, Part Number=RESC0402-18K0-1pct
R24: library part RESC0603-4K70-1pct, "RES 4.70K OHM 1% 1/10W 0603", Manufacturer 1=Yageo, Manufacturer 2="Stackpole Electronics", Manufacturer 3="Vishay Dale", Manufacturer 4="Panasonic Electronic Components", Manufacturer Part Number 1=RC0603FR-074K7L, Manufacturer Part Number 2=RMCF0603FT4K70, Manufacturer Part Number 3=CRCW06034K70FKEA, Manufacturer Part Number 4=ERJ-3EKF4701V, Ohms=4700, Part Number=RESC0603-4K70-1pct
U1: library part BUF802IRGTR, "WIDE-BANDWIDTH JFET BUFFER", Manufacturer="Texas Instruments", Supplier Part Number 1=296-BUF802IRGTRCT-ND, Manufacturer Part Number=BUF802IRGTR, Pricing 1="1=5.06, 10=4.541, 25=4.2928, 100=3.7206, 250=3.5298, 500=3.16728, 1000=2.88 (USD)", Stock 1=1253, Supplier 1=Digi-Key, Supplier 2=Mouser, Supplier Part Number 2=595-BUF802IRGTR
U2: library part OPA140AIDR, "IC OPAMP JFET 1 CIRCUIT 8SOIC", Case/Package=D, Input Bias Current=10pA, Input Offset Voltage (Vos)=30uV, Manufacturer="Texas Instruments", Max Dual Supply Voltage=18V, Max I/O Voltage=120uV, Max Operating Temperature=125°C, Max Supply Voltage=36V, Min Dual Supply Voltage=2.25V, Min Operating Temperature=-40°C, Min Supply Voltage=4.5V, Nominal Supply Current=2mA, Operating Supply Current=1.8mA, Output Current=36mA, Package Quantity=2500, Power Supply Rejection Ratio (PSRR)=140dB, Supplier Part Number 1=296-43606-6-ND, Voltage Gain=126dB, Common Mode Rejection Ratio=126dB, ComponentLink1Description=https://datasheet.ciiva.com/14459/sbos498a-14459066.pdf?src-supplier=Avnet, ComponentLink1URL=https://datasheet.ciiva.com/14459/sbos498a-14459066.pdf?src-supplier=Avnet, ComponentLink2Description=https://datasheet.ciiva.com/1815/opa140-1815515.pdf?src-supplier=Digi-Key, ComponentLink2URL=https://datasheet.ciiva.com/1815/opa140-1815515.pdf?src-supplier=Digi-Key, Contact Plating=Gold, Gain Bandwidth Product=11MHz, Lead Free="Lead Free", Manufacturer Part Number=OPA140AIDR, Nominal Gain Bandwidth Product=11MHz, Number of Channels=1, Number of Circuits=1, Number of Elements=1, Number of Pins=8, Operating Supply Voltage=18V, Output Current per Channel=36mA, Packaging="Tape and Reel", Pricing 1="1=4.01, 10=3.606, 25=3.4088, 100=2.9542, 250=2.80276, 500=2.5149, 1000=2.121 (USD)", Radiation Hardening=No, RoHS Compliant=Yes, Series=-, Slew Rate=20V/µs, Stock 1=3434, Supplier 1=Digi-Key, Supplier 2=Mouser, Supplier Part Number 2=595-OPA140AIDR, Supply Current=2mA, Technology=BIFET, Unity Gain Bandwidth Product=11MHz
U3: library part TPS7A3901DSCR, "IC REG LINEAR POS/NEG ADJ 10WSON", Dropout Voltage=500mV, Manufacturer="Texas Instruments", Max Input Voltage=33V, Max Operating Temperature=125°C, Max Output Voltage=-30V, Max Supply Current=904uA, Min Operating Temperature=-40°C, Min Output Voltage=0V, Output Current=150mA, Power Supply Rejection Ratio (PSRR)=69dB, Quiescent Current=150uA, Supplier Part Number 1=296-TPS7A3901DSCRCT-ND, ComponentLink1Description=http://www.ti.com/lit/ds/symlink/tps7a39.pdf?src-supplier=Digi-Key, ComponentLink1URL=http://www.ti.com/lit/ds/symlink/tps7a39.pdf?src-supplier=Digi-Key, ComponentLink2Description=http://www.ti.com/general/docs/suppproductinfo.tsp?distId=10&amp;gotoUrl=http%3A%2F%2Fwww.ti.com%2Flit%2Fgpn%2Ftps7a39&src-supplier=Digi-Key, ComponentLink2URL=http://www.ti.com/general/docs/suppproductinfo.tsp?distId=10&amp;gotoUrl=http%3A%2F%2Fwww.ti.com%2Flit%2Fgpn%2Ftps7a39&src-supplier=Digi-Key, Copyright="Copyright (C) 2022 Ultra Librarian. All rights reserved.", Manufacturer Part Number=TPS7A3901DSCR, Manufacturer_Part_Number=TPS7A3901DSCR, Mfr_Name="Texas Instruments", Mount="Surface Mount", Number of Regulators=2, Output Type=Adjustable, Packaging="Cut Tape", RefDes=RefDes, Series=-, Stock 1=0, Supplier 1=Digi-Key, Supplier 2=Mouser, Supplier Part Number 2=595-TPS7A3901DSCR, Type=DEV
U4: library part LTC3261EMSE, "IC REG CHARG PUMP INV 12MSOP", Case/Package=SOP, Manufacturer="Analog Devices / Linear Technology", Manufacturer Part Number=LTC3261EMSE#TRPBF, Manufacturer_Part_Number=ltc3261emse#pbf, Max Input Voltage=32V, Max Operating Temperature=125°C, Max Output Current=100mA, Mfr_Name="Linear Technology", Min Input Voltage=4.5V, Min Operating Temperature=-40°C, Operating Supply Current=60uA, Output Voltage=-32V, Package Quantity=2500, Supplier Part Number 1=LTC3261EMSE#TRPBFCT-ND, Switching Frequency=500kHz, ComponentLink1Description=http://components.arrow.com/part/dataview/53470050S89425N7433?src-supplier=Arrow+Electronics, ComponentLink1URL=http://components.arrow.com/part/dataview/53470050S89425N7433?src-supplier=Arrow+Electronics, ComponentLink2Description=http://cds.linear.com/docs/en/datasheet/3261fb.pdf?src-supplier=Digi-Key, ComponentLink2URL=http://cds.linear.com/docs/en/datasheet/3261fb.pdf?src-supplier=Digi-Key, ComponentLink3Description=http://www.linear.com/docs/44087?src-supplier=Digi-Key, ComponentLink3URL=http://www.linear.com/docs/44087?src-supplier=Digi-Key, Copyright="Copyright (C) 2022 Ultra Librarian. All rights reserved.", Lead Free="Lead Free", Max Supply Voltage=32V, Min Supply Voltage=4.5V, Number of Outputs=1, Number of Pins=12, Output Current=100mA, Output Type=Adjustable, Packaging="Tape and Reel", RefDes=RefDes, RoHS Compliant=Yes, Series=-, Stock 1=0, Supplier 1=Digi-Key, Supplier 2=Mouser, Supplier 3=Newark, Supplier Part Number 2=584-LTC3261EMSETRPBF, Supplier Part Number 3=50AK2864, Synchronous Rectifier=No, Type=DEV

## Via types
v1: diameter 19.68, hole 11.81, Top to Bottom Layer, tented both sides, 198 vias

## Nets (pads, with @x,y where several pads share a name; then routed paths per layer and width w, separated by ;. In a path a pad name is that pad's centre, name@x,y a point inside that pad or via, vN(x,y) a via of type N, cw(c..) or ccw(c..) an arc to the next point about the centre after c; other vN are vias at no path point)
GND: C3.2 C9.2 C10.2 C11.1 C12.2 C13.1 C14.2 C15.1 C16.2 C17.1 C22.2 C23.1 C24.2 C25.2 D2.2 J2.1 J3.2 J4.2 J4.3 J5.1 R4.2 R8.2 R13.3 R22.2 U1.17 U3.4 U3.11 U4.1 U4.2 U4.3 U4.11 U4.12 U4.EPAD | length 137.2
  Top w7.87: R4.2 313.68,702.89 J5.1 ; U3.4 U3.11@1464.57,281.5
  other v1: 759.84,27.56 799.21,27.56 838.58,27.56 877.95,27.56 917.32,27.56 956.69,27.56 996.06,27.56 1035.43,27.56 1074.8,27.56 1114.17,27.56 1153.54,27.56 1192.91,27.56 1232.28,27.56 1271.65,27.56 1311.02,27.56 1350.39,27.56 1389.76,27.56 1429.13,27.56 1468.5,27.56 1507.87,27.56 1547.24,27.56 1586.61,27.56 1625.98,27.56 1665.35,27.56 1704.72,27.56 1744.09,27.56 1783.46,27.56 1822.83,27.56 1862.2,27.56 1901.57,27.56 1940.94,27.56 1980.31,27.56 2019.68,27.56 2059.05,27.56 2098.42,27.56 2137.79,27.56 2177.16,27.56 2216.53,27.56 2255.9,27.56 2295.27,27.56 2334.64,27.56 2374.01,27.56 2413.38,27.56 2452.75,27.56 2492.12,27.56 2531.49,27.56 2570.86,27.56 2610.23,27.56 2649.6,27.56 2688.97,27.56 2728.34,27.56 2728.34,66.93 875.98,71.85 2728.34,106.3 912.4,109.25 564.96,118.11 604.33,118.11 643.7,118.11 683.07,118.11 722.44,118.11 537.12,145.95 2728.34,145.67 509.28,173.79 2728.34,185.04 481.44,201.63 1091.54,214.57 1726.38,224.41 1777.56,224.41 2728.34,224.41 453.61,229.47 1128.94,252.95 425.77,257.3 1907.48,261.81 2728.34,263.78 397.93,285.14 1461.61,301.26 1506.89,301.18 1907.48,301.18 2728.34,303.15 370.09,312.98 450.79,314.96 342.25,340.82 2728.34,342.52 411.42,354.33 450.79,354.33 723.43,354.33 313.99,365.18 1726.38,377.95 1777.56,377.95 2728.34,381.89 372.05,393.7 411.42,393.7 450.79,393.7 723.43,393.7 2728.34,421.26 1141.73,428.15 332.68,433.07 372.05,433.07 411.42,433.07 450.79,433.07 723.43,433.07 919.29,462.6 590.55,531.49 450.79,629.92 728.66,629.92 450.79,669.29 728.66,669.29 450.79,708.66 728.66,708.66 450.79,748.03 710.94,759.84 750.31,759.84 789.68,759.84 829.05,759.84 868.42,759.84 907.79,759.84 947.16,759.84 986.53,759.84 1025.9,759.84 1065.27,759.84 1104.64,759.84 1144.01,759.84 1183.38,759.84 1222.75,759.84 1262.12,759.84 1301.49,759.84 1340.86,759.84 1380.23,759.84 1419.6,759.84 1458.97,759.84 1498.34,759.84 1537.71,759.84 1577.08,759.84 1616.45,759.84 1655.82,759.84 1695.19,759.84 1734.56,759.84 1773.93,759.84 1813.3,759.84 1852.67,759.84 1892.04,759.84 1931.41,759.84 1970.78,759.84 2010.15,759.84 2049.52,759.84 2088.89,759.84 2128.26,759.84 2167.63,759.84 2207,759.84 2246.37,759.84 2285.74,759.84 2325.11,759.84 2364.48,759.84 2403.85,759.84 2443.22,759.84 2482.59,759.84
NetC1_1: C1.1 C5.2 R3.2 R4.1 | length 129.7
  Top w7.87: R4.1 R3.2 354.33,589.86 C5.2 C1.1
NetC1_2: C1.2 R2.1 | length 43.3
  Top w7.87: C1.2 R2.1
NetC2_1: C2.1 R11.1 R12.1 U2.2 | length 328.4
  Top w7.87: R11.1 R12.1 C2.1 ; U2.2@769.69,276.57 U2.2@769.69,283.86 ; C2.1@769.69,457.97 C2.1 ; U2.2 U2.2@769.69,283.86 ; U2.2@769.69,283.86 756.89,283.86 750.66,290.09 750.66,368.66 769.69,387.68 774.31,392.31 C2.1
NetC2_2: C2.2 R15.2 U2.6 | length 334.7
  Top w8: C2.2 813.68,461.22 R15.2 813.68,387.11 966.93,233.86 U2.6
NetC3_1: C3.1 R15.1 U1.4 | length 470
  Top w7.87: C3.1 853.05,420.67 R15.1 v1(879.92,419.29)
  Top w8: v1(532.8,473.74) U1.4@532.8,501.95
  Layer 1 w7.87: 725.56,473.74 825.47,473.74 v1(879.92,419.29)
  Layer 1 w8: v1(532.8,473.74) 725.56,473.74
NetC4_1: C4.1 R1.2 R3.1 R6.1 | length 129.7
  Top w7.87: R1.2 R6.1 C4.1 311.02,589.86 R3.1
NetC4_2: C4.2 C5.1 | length 43.3
  Top w7.87: C4.2 C5.1
NetC6_1: C6.1 R20.2 R22.1 U3.9
NetC7_1: C7.1 U4.7 U4.8
NetC7_2: C7.2 U4.5 U4.6
NetC8_1: C8.1 R21.1 R23.1 U3.7
NetC9_1: C9.1 U3.3 | length 46
  Top w7.87: C9.1@1386.81,292.32 1395.67,301.18 U3.3
NetD1_1: D1.1 J4.1
NetD2_1: D2.1 R24.2 | length 67.7
  Top w7.87: D2.1 R24.2
NetR2_2: R2.2 R10.1 U1.2 | length 95.4
  Top w7.87: R2.2 R10.1 493.41,541.33 U1.2
NetR6_2: R6.2 R8.1 R9.1 | length 621.7
  Top w7.87: R6.2 267.72,453.74 489.17,232.28 R9.1 R8.1
NetR9_2: R9.2 U2.3 | length 63.3
  Top w7.87: R9.2 794.69,232.28 U2.3
NetR10_2: R10.2 U1.3 | length 52.1
  Top w7.87: R10.2 493.4,521.64 U1.3
NetR11_2: R11.2 R19.1 U1.11 | length 93.7
  Top w7.87: U1.11@648.8,541.33 688.01,541.33 695.89,549.21 R11.2@695.89,505.91
NetR12_2: R12.2 R13.1 R13.2 | length 326.6
  Top w7.87: R12.2 920.78,505.91 954.24,472.44 R13.2 1013.38,472.44 1058.65,517.72 R13.1
NetR16_1: R16.1 U1.7 | length 47.5
  Top w7.87: U1.7 600.4,426.43 600.64,426.18 R16.1@600.71,426.18
NetR17_1: R17.1 U1.15 U1.16
NetR18_1: R18.1 U1.13 U1.14
NetR23_2: R23.2 U3.8
OUT: J3.1 R19.2 | length 2019.6
  Top w6.16: R19.2 778.87,549.21 ccw(c778.87,598.32) 813.6,563.6 815.21,565.21 834.27,584.27 cw(c877.95,540.58) 877.95,602.36 J3.1
TIP: J1.1 R1.1 | length 132.3
  Top w7.87: J1.1 119,512.5 R1.1
V+: C22.1 C24.1 D1.3 U3.1 U3.2 U4.9 U4.10 | length 301.1
  Top w15.75: U4.10 1894.68,405.51 1920.28,405.51 U4.9 C24.1@1920.28,464.57
  Top w19.68: C24.1@1938.98,464.57 D1.3
  other v1: 1421.26,469.49 1448.82,469.49 1421.26,497.05 1448.82,497.05 1924.21,502.95 1951.77,502.95 1925.2,530.51 1951.77,530.51
V-: C23.2 C25.1 U3.5 U4.4 | length 89.2
  Top w15.75: C25.1@1920.28,106.3 U4.4
  other v1: 1981.3,90.55 2008.86,90.55 1421.26,104.33 1448.82,104.33 1981.3,118.11 2008.86,118.11 1421.26,131.89 1448.82,131.89
VCC: C6.2 C10.1 C12.1 C14.1 C16.1 R17.2 R20.1 R24.1 U1.1 U1.12 U2.7 U3.10 | length 33.9
  Top w8: R24.1 v1(1057.09,697.83)
  other v1: 1128.94,323.82 1091.54,361.22 1572.83,397.64 1603.02,397.64 1633.2,397.64 1663.39,397.64 531.5,748.03 561.02,748.03 590.55,748.03 620.08,748.03 649.61,748.03
VEE: C8.2 C11.2 C13.2 C15.2 C17.2 R16.2 R18.2 R21.2 U1.5 U1.6 U1.8 U1.9 U1.10 U2.4 U3.6 | length 596.7
  Top w8: R18.2 v1(612.2,702.76)
  Layer 1 w8: v1(612.2,702.76) 566.93,657.48 566.93,488.19 855.32,488.19 889.76,453.74
  other v1: 805.12,71.85 766.73,109.25 1572.83,200.79 1603.02,200.79 1633.2,200.79 1663.39,200.79 531.5,317.91 561.02,317.91 590.55,317.91 620.08,317.91 649.61,317.91
pads on no net: D1.2 U2.1 U2.5 U2.8

## Polygon pours and split planes (outlines as drawn)
GND on Top "GND_L01_P110" (solid, pour order 110): 289.37,0 2755.91,0 2755.91,787.4 435.04,787.4 238.19,787.4 238.19,683.07 438.98,683.07 438.98,610.24 507.87,610.24 507.87,460.63 289.37,460.63
VCC on Top "VCC_L01_P090" (solid, pour order 90): 1551.18,355.31 1551.18,335.63 1527.56,335.63 1527.56,381.89 1561.02,381.89 1561.02,525.59 1675.2,525.59 1675.2,355.31
VEE on Top "VEE_L01_P035" (solid, pour order 35): 513.78,526.57 669.29,526.57 669.29,299.21 513.78,299.21
VCC on Top "VCC_L01_P034" (solid, pour order 34): 513.78,556.1 513.78,787.4 669.29,787.4 669.29,556.1
V- on Top "V-_L01_P108" (solid, pour order 108): 1912.4,136.81 1912.4,75.79 2023.62,75.79 2023.62,136.81
V- on Top "V-_L01_P106" (solid, pour order 106): 1408.46,266.73 1440.94,266.73 1440.94,230.31 1462.6,230.31 1462.6,90.55 1408.46,90.55
V+ on Top "V+_L01_P104" (solid, pour order 104): 1965.55,426.18 1965.55,543.31 1912.4,543.31 1912.4,426.18
V+ on Top "V+_L01_P102" (solid, pour order 102): 1408.46,315.94 1440.94,315.94 1440.94,372.05 1461.61,372.05 1461.61,511.81 1408.46,511.81
NetC6_1 on Top "NETC6_1_L01_P096" (solid, pour order 96): 1527.56,341.54 1683.07,341.54 1683.07,316.93 1527.56,316.93
NetC8_1 on Top "NETC8_1_L01_P094" (solid, pour order 94): 1527.56,286.42 1527.56,238.19 1683.07,238.19 1683.07,286.42
NetR23_2 on Top "NETR23_2_L01_P100" (solid, pour order 100): 1527.56,306.1 1527.56,296.26 1683.07,296.26 1683.07,306.1
VEE on Top "VEE_L01_P092" (solid, pour order 92): 1561.02,220.47 1527.56,220.47 1527.56,266.73 1551.18,266.73 1551.18,247.05 1675.2,247.05 1675.2,76.77 1561.02,76.77
NetD1_1 on Top "Top-NetD1_1" (solid, pour order 78): 2188.98,303.15 2261.81,303.15 2261.81,90.55 2100.39,90.55 2100.39,437.01 2188.98,437.01
NetC7_2 on Top "Top-NetC7_2" (solid, pour order 76): 1937.99,168.31 1979.33,168.31 2080.71,216.54 2080.71,268.7 1937.99,268.7
NetC7_1 on Top "Top-NetC7_1" (solid, pour order 74): 1937.99,394.69 1979.33,394.68 2080.71,346.46 2080.71,294.29 1937.99,294.29
NetR17_1 on Top "NETR17_1_L01_P031" (solid, pour order 31): 555.12,574.8 584.65,574.8 584.65,651.57 555.12,651.57
VCC on Top "VCC_L01_P048" (solid, pour order 48): 1039.37,271.65 1039.37,302.17 1069.88,302.17 1139.76,302.17 1139.76,370.08 978.35,370.08 978.35,271.65
VEE on Top "VEE_L01_P046" (solid, pour order 46): 757.87,195.87 826.77,195.87 826.77,59.06 757.87,59.06
NetR18_1 on Top "NETR18_1_L01_P030" (solid, pour order 30): 596.46,574.8 596.46,651.57 625.98,651.57 625.98,574.8
VEE on Layer 1 "VEE_L03_P070" (solid, pour order 70): 1866.14,0 1866.14,787.4 509.84,787.4 509.84,0
VCC on Layer 1 "VCC_L03_P066" (solid, pour order 66): 513.78,575.79 557.56,575.79 557.56,486.95 1025.59,486.95 1025.59,301.26 1866.14,301.26 1866.14,787.4 513.78,787.4
V+ on Layer 1 "V+_L03_P058" (solid, pour order 58): 1407.48,455.71 1407.48,559.06 1986.22,559.06 1986.22,455.71
V- on Layer 1 "V-_L03_P062" (solid, pour order 62): 1407.48,0 2026.57,0 2026.57,142.72 1407.48,142.72
GND on Bottom Layer "GND_L04_P114" (solid, pour order 114): 513.78,575.79 557.56,575.79 557.56,460.63 289.37,460.63 289.37,0 434.37,0 2931.1,0 2931.1,787.4 437.99,787.4 238.19,787.4 238.19,683.07 438.98,683.07 438.98,610.26 513.78,610.26
GND on Ground "GND_L02_P112" (solid, pour order 112): 238.19,683.07 438.98,683.07 438.98,610.24 513.78,610.24 513.78,575.79 557.48,575.79 557.48,460.63 289.37,460.63 289.37,0 2931.1,0 2931.1,787.4 440.94,787.4 238.19,787.4

## Other copper
Top:
  pour cut-out: 547.24,574.8 547.24,488.19 633.86,488.19 633.86,574.8
  pour cut-out: 1440.94,348.43 1527.56,348.43 1527.56,253.94 1440.94,253.94
Layer 1:
  pour cut-out: 1397.28,559.06 1397.28,787.4 1900.59,787.4 1900.59,559.06
Ground:
  region net GND: 2755.91,649.61 2755.91,555.12 2740.16,555.12 2740.16,649.61

## Silkscreen, mask and mechanical layers (free items; w line width, h text height)
Top Overlay:
  circle w10: c1816.98,195.87 r2.86
  circle w10: c1407.48,365.16 r2.86